# EAGLE board supply (EAGLE 9.6.1)
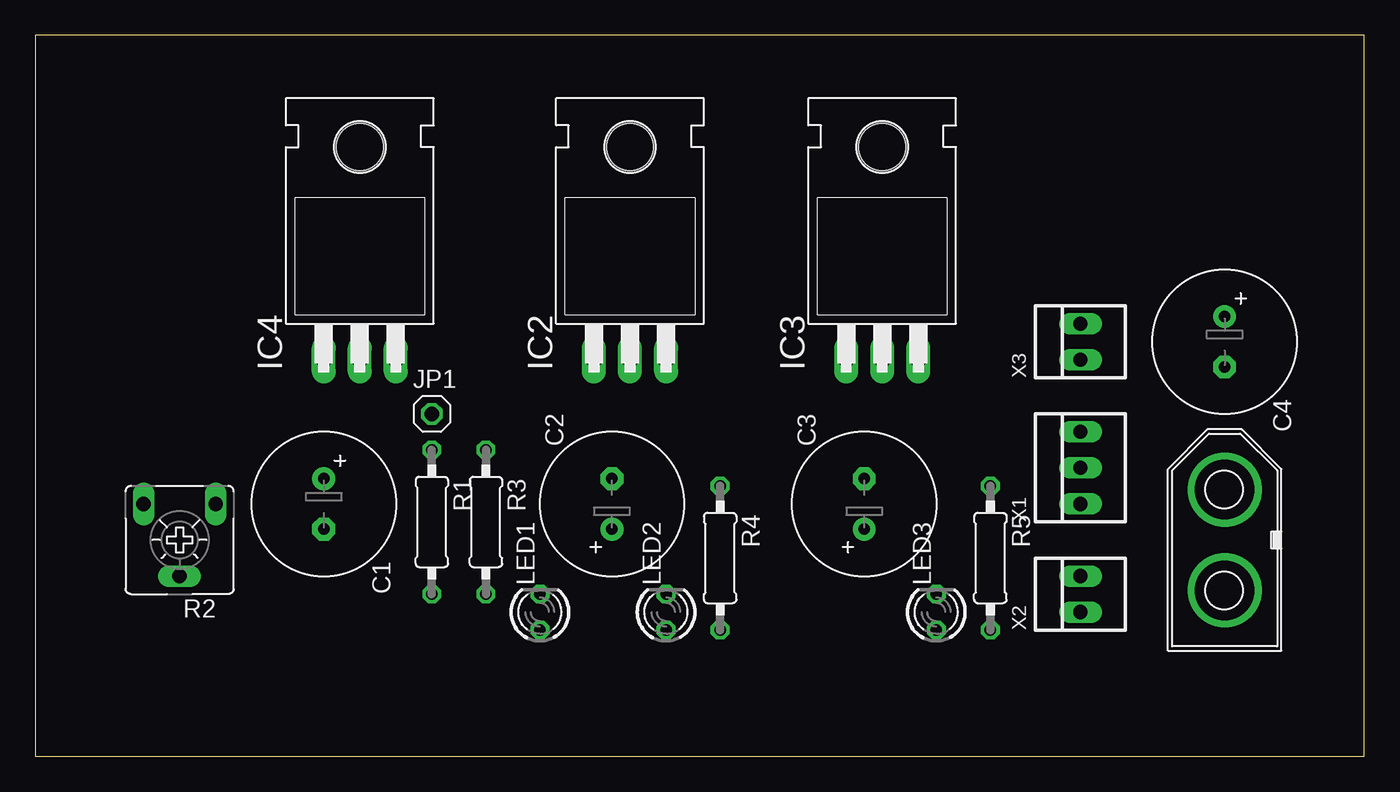
[diagram p0: board, top side]
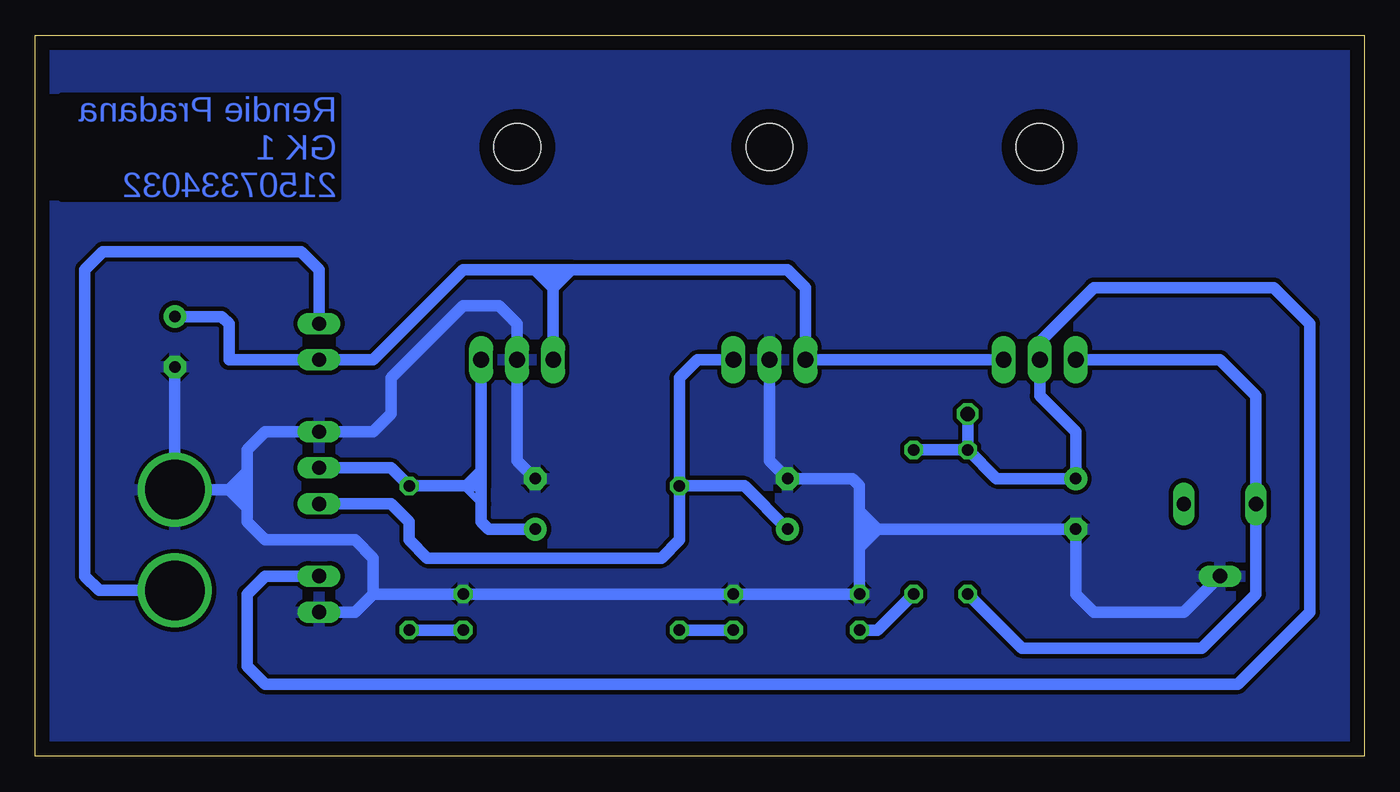
[diagram p1: board, bottom side, seen from below]

Size 93.65 x 50.79 mm. Coordinates in mm from the lower left corner, seen from the top.
Outline: 0,0 93.65,0 93.65,50.79 0,50.79 0,0
Copper layers (1*16): Top 0.035mm / dielectric 1.5mm / Bottom 0.035mm
Design rules "default *": minimum track width 6mil, minimum drill 0.35mm, track to track 12mil, track to pad 12mil, pad to pad 12mil, via to via 12mil, smd to smd 12mil, copper to edge 40mil, drill to drill 6mil, minimum pad ring 10mil, minimum via ring 8mil, stop-mask expansion 4mil, vias tented up to drill 0mil, thermal gap 10mil

## Footprints (pad centres in the part's own frame; a part is rotated, then mirrored left to right if it is on the bottom)
E3,5-10 = drill 0.813 pad 1.6: + -1.778,0 | drill 0.813 pad 1.6 octagon: - 1.778,0
TO220H = drill 1.118 long: 1 -2.54,-10.16; 2 0,-10.16; 3 2.54,-10.16 | hole 3.302: 0,4.826
1X01 = drill 1.016 octagon: 1 0,0
LED3MM = drill 0.813 octagon: A -1.27,0; K 1.27,0
0207/10 = drill 0.813 octagon: 1 -5.08,0; 2 5.08,0
CA6V = drill 1.016 long: A -2.54,-2.54; E 2.54,-2.54; S 0,2.54
CON-XT60M = drill 4.2: V+ -3.55,0; V- 3.55,0
22-23-2031 = drill 1 long: 1 -2.54,0; 2 0,0; 3 2.54,0
22-23-2021 = drill 1 long: 1 -1.27,0; 2 1.27,0

## Placement (x,y rotation side)
C1  1000uF/16V  [E3,5-10]  20.32,17.78 270 top
C2  1000uF/16V  [E3,5-10]  40.64,17.78 90 top
C3  1000uF/16V  [E3,5-10]  58.42,17.78 90 top
C4  1000uF/16V  [E3,5-10]  83.82,29.21 270 top
IC2  7805T  [TO220H]  41.91,38.1 0 top
IC3  7805T  [TO220H]  59.69,38.1 0 top
IC4  317T  [TO220H]  22.86,38.1 0 top
JP1  [1X01]  27.94,24.13 0 top
LED1  [LED3MM]  35.56,10.16 90 top
LED2  [LED3MM]  44.45,10.16 90 top
LED3  [LED3MM]  63.5,10.16 90 top
R1  1K2  [0207/10]  27.94,16.51 270 top
R2  20K  [CA6V]  10.16,15.24 180 top
R3  1K  [0207/10]  31.75,16.51 270 top
R4  1K  [0207/10]  48.26,13.97 270 top
R5  1K  [0207/10]  67.31,13.97 270 top
VIN  [CON-XT60M]  83.82,15.24 90 top
X1  VSYS  [22-23-2031]  73.66,20.32 90 top
X2  VMOT  [22-23-2021]  73.66,11.43 90 top
X3  switch  [22-23-2021]  73.66,29.21 90 top

## Library data of the parts
C1-C4 R1 R3-R5 = rcl
IC2-IC4 = linear
JP1 = pinhead
LED1-LED3 = led
R2 = pot
VIN = con-XT60M
X1 = con-molex; MF: MOLEX; MPN: 22-23-2031; OC_FARNELL: 1462950; OC_NEWARK: 30C0862
X2 X3 = con-molex; MF: MOLEX; MPN: 22-23-2021; OC_FARNELL: 1462926; OC_NEWARK: 25C3832

## Nets
+12V: C3.+ IC3.3 R5.1 X1.2
GND: C1.- C2.- C3.- C4.- IC2.2 IC3.2 LED1.K LED2.K LED3.K R2.S VIN.V- X1.3 X2.1
N$1: IC4.1 R1.2 R2.E
N$2: LED1.A R3.2
N$3: LED3.A R5.2
N$4: VIN.V+ X3.2
N$5: LED2.A R4.2
VCC: C2.+ IC2.3 R4.1 X1.1
VDD: C1.+ IC4.2 JP1.1 R1.1 R3.1 X2.2
VPP: C4.+ IC2.1 IC3.1 IC4.3 X3.1

## Tracks (layer width: path | path; a pad name or v marks a point on that pad's centre or on a via)
+12V
  Bottom 0.508: 62.86,19.68 63.5,19.05 62.23,17.78 | 62.86,19.68 62.23,20.32 | 62.23,19.05 62.86,19.68
  Bottom 0.813: C3.+ 61.72,16 62.23,16.51 62.23,17.78 62.23,19.05 | IC3.3 62.23,20.32 62.23,19.05 | 62.23,19.05 63.5,19.05 R5.1 68.58,20.32 X1.2
GND
  Bottom 0.152: IC2.2 41.91,26.67
  Bottom 0.813: R2.S 12.7,10.16 19.05,10.16 20.32,11.43 C1.- 34.29,16 | C3.- 59.69,20.83 IC3.2 59.69,30.48 60.96,31.75 63.5,31.75 68.58,26.67 68.58,24.13 69.85,22.86 X1.3 77.47,22.86 78.74,21.59 78.74,20.06 | C4.- VIN.V- 80.01,18.79 | X2.1 71.12,10.16 69.85,11.43 | IC2.2 41.91,20.83 C2.- 36.07,19.56 35.56,19.05 35.56,17.27 | 69.85,11.43 LED3.K LED2.K LED1.K 35.56,13.97 35.56,14.73 | 69.85,11.43 69.85,13.97 71.12,15.24 77.47,15.24 78.74,16.51 78.74,17.52 | 78.74,17.52 78.74,17.78 | 78.74,17.78 78.74,19.05 | 78.74,19.05 78.74,20.06 | 78.74,19.05 79,18.79 79.75,18.79 | 80.01,18.79 78.74,20.06 | 80.01,18.79 79.75,18.79 | 79.75,18.79 78.74,17.78 | 80.01,18.79 78.74,17.52 | 35.56,16 35.56,15.24 | 35.56,15.24 35.56,14.73 | 35.56,16 34.29,16 | 35.56,17.27 35.56,16 | 34.29,16 35.56,17.27 | 34.29,16 35.05,15.24 | 35.05,15.24 35.56,15.24 | 35.56,14.73 35.05,15.24
  pour Bottom: 0,50.8 0,0 93.98,0 93.98,50.8 1.27,50.8
N$1
  Bottom 0.813: R1.2 24.13,7.62 11.43,7.62 7.62,11.43 R2.E 7.62,25.4 10.16,27.94 IC4.1
N$2
  Bottom 0.813: R3.2 34.29,8.89 LED1.A
N$3
  Bottom 0.813: R5.2 LED3.A
N$4
  Bottom 0.813: VIN.V+ 89.16,11.69 90.17,12.7 90.17,34.29 88.9,35.56 74.93,35.56 73.66,34.29 X3.2
N$5
  Bottom 0.813: LED2.A R4.2
VCC
  Bottom 0.813: R4.1 48.26,15.24 49.53,13.97 66.04,13.97 67.31,15.24 67.31,16.51 68.58,17.78 X1.1 | C2.+ 43.69,19.05 R4.1 | IC2.3 46.99,27.94 48.26,26.67 R4.1
VDD
  Bottom 0.813: JP1.1 R1.1 | R1.1 R3.1 | X2.2 77.47,12.7 78.74,11.43 78.74,6.35 77.47,5.08 8.89,5.08 3.81,10.16 3.81,30.48 6.35,33.02 19.05,33.02 22.86,29.21 IC4.2 22.86,25.4 20.32,22.86 C1.+ 25.91,19.56 R1.1
VPP
  Bottom 0.813: C4.+ 80.52,30.99 80.01,30.48 80.01,27.94 X3.1 69.85,27.94 63.5,34.29 58.42,34.29 | IC4.3 IC2.1 39.37,33.02 40.64,34.29 55.88,34.29 | IC3.1 57.15,33.02 | 57.15,33.02 55.88,34.29 | 57.15,33.02 58.42,34.29 | 55.88,34.29 57.15,34.29 | 57.15,34.29 58.42,34.29 | 57.15,33.02 57.15,34.29

## Text on the board
Bottom: Rendie Pradana / GK 1 / 21507334032